# Altium PCB PCB.PcbDoc
Units mil, origin at the board's own origin, x right, y up, seen from the top; angles counter-clockwise.
Board outline 2470.47 x 1318.9 mil, 2 copper layers (Top Layer, Bottom Layer); 18 components, 21 nets, 150 pads, 31 vias.
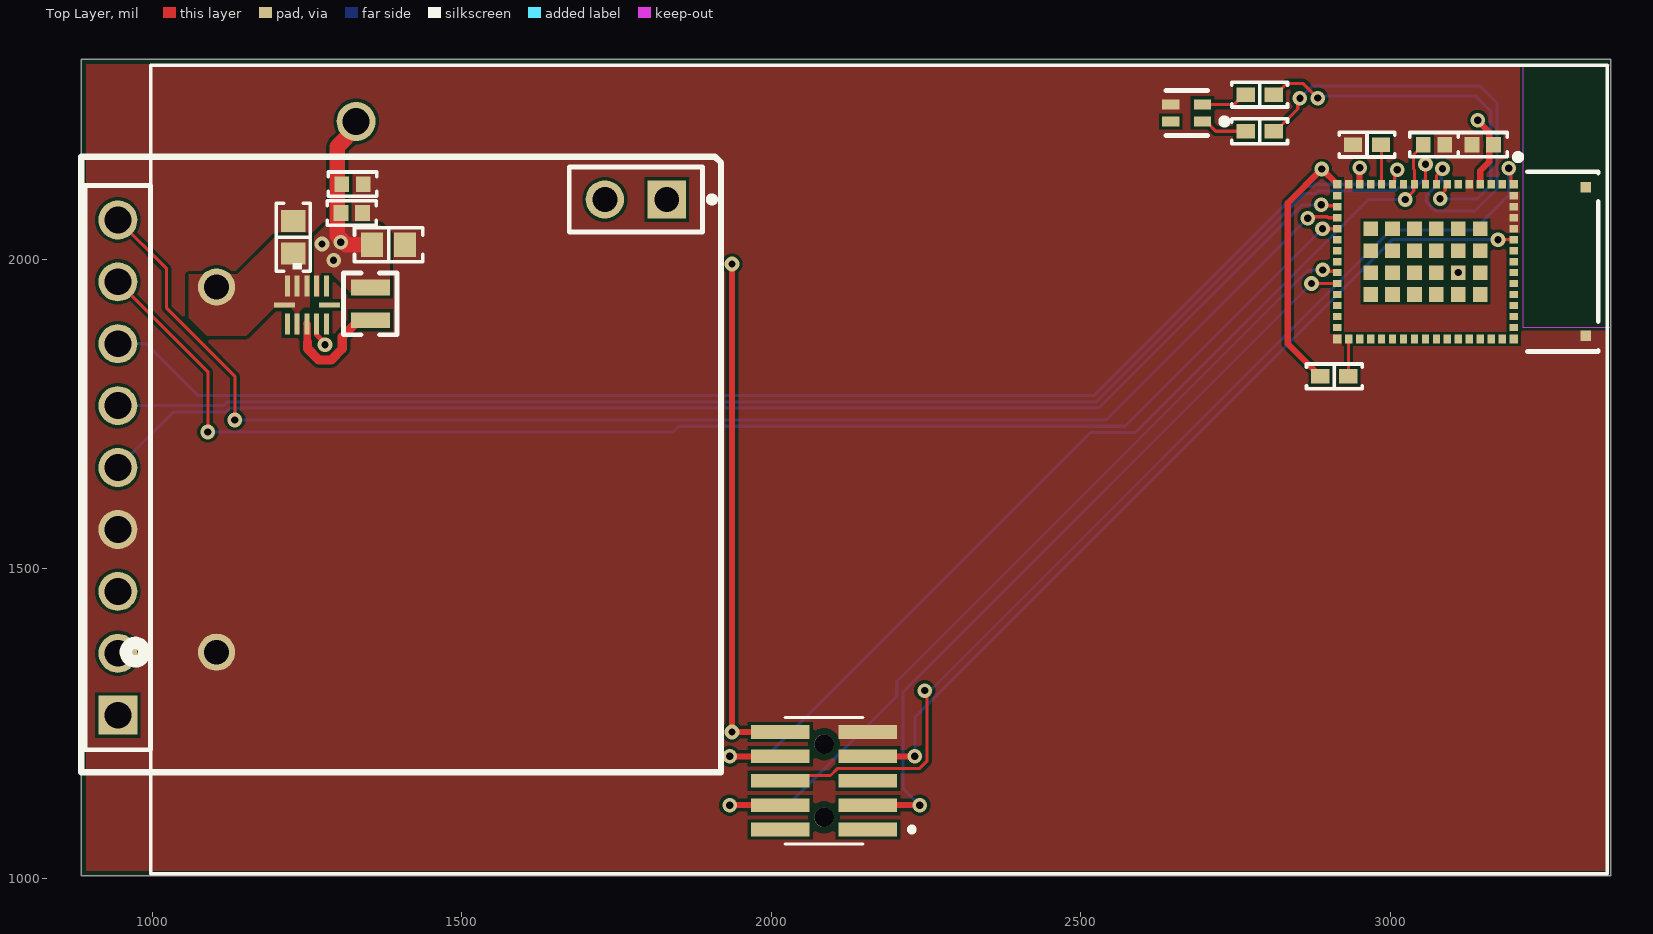
[diagram p0: Top Layer view]
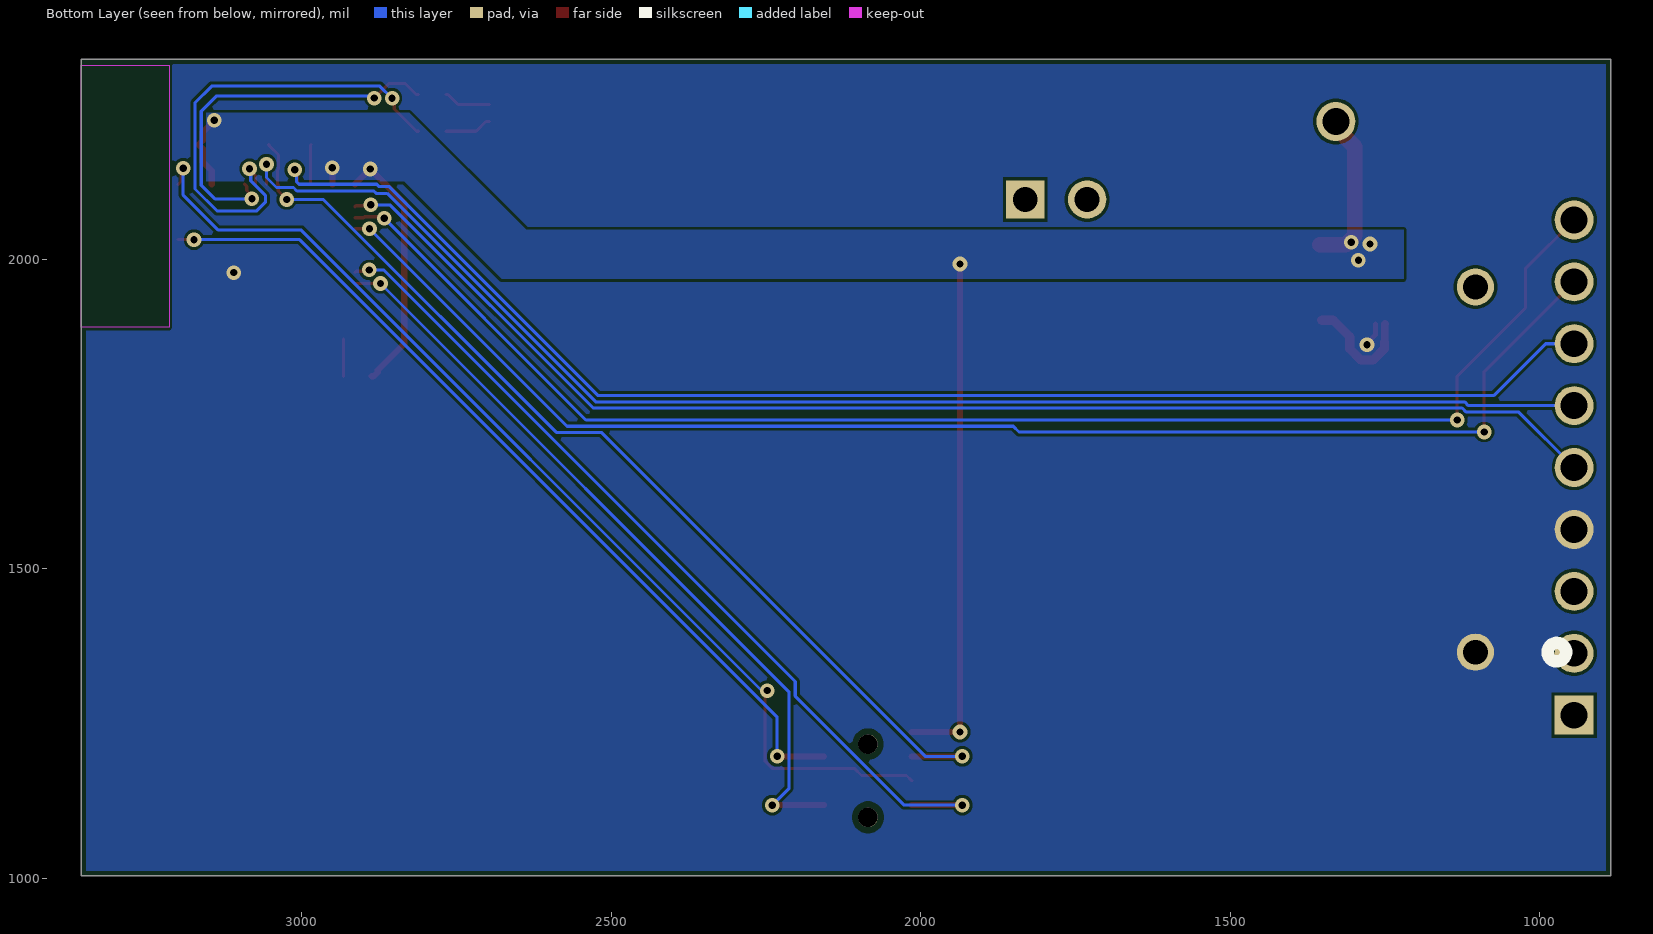
[diagram p1: Bottom Layer view, seen from below]

## Layer stack, top to bottom
Top Solder: solder mask 0.4, Solder Resist, Dk 3.5
Top Layer: signal copper 1.4
Dielectric 1: dielectric 12.6, FR-4, Dk 4.8
Bottom Layer: signal copper 1.4
Bottom Solder: solder mask 0.4, Solder Resist, Dk 3.5

## Board outline
885.83,1003.94 3356.3,1003.94 3356.3,2322.83 885.83,2322.83

## Design rules (kind name [scope] priority, off if disabled: settings)
BoardOutlineClearance [All] p1: gap=7.87 ignorepadtopadclearanceinfootprint=FALSE
Clearance [All] p1: gap=5 ignorepadtopadclearanceinfootprint=FALSE except(9.84: Arc-Hole Track-Hole SMDPad-Hole THPad-Hole Via-Hole Fill-Hole Poly-Hole Region-Hole Text-Hole)
ComponentClearance [All] p1: gap=5 collisioncheckmode=3 verticalgap=5 showdistances=TRUE
DiffPairsRouting [All] p1: maxlimit=10 minlimit=5 mostfreqgap=5 toplayer_minwidth=5 toplayer_maxwidth=1000 toplayer_prefwidth=5 bottomlayer_minwidth=5 bottomlayer_maxwidth=1000 bottomlayer_prefwidth=5 maxuncoupledlength=500
Height [All] p1: minheight=0 maxheight=71497.94 prefheight=500
HoleSize [All] p1: absolutevalues=TRUE maxlimit=248.03 minlimit=11.81 maxpercent=80.000 minpercent=20.000
HoleToHoleClearance [All] p1: gap=9.84 allowstackedmicrovias=FALSE
MinimumAnnularRing [All] p1: minimumring=3
MinimumSolderMaskSliver [All] p1: minsoldermaskwidth=0
PlaneClearance [All] p1: clearance=5
PlaneConnect PlaneConnectPowerPads [InPadClass('PowerPads')] p1: planeconnectstyle=Direct reliefexpansion=20 reliefentries=4 reliefconductorwidth=10 reliefairgap=10
PlaneConnect [All] p2: planeconnectstyle=Direct reliefexpansion=11.81 reliefentries=4 reliefconductorwidth=5 reliefairgap=5
PolygonConnect PolygonConnectPowerPads [All vs (InPadClass('PowerPads'))] p1: connectstyle=Direct reliefconductorwidth=10 reliefentries=4 polygonreliefangle="90 Angle" airgapwidth=10
PolygonConnect [All] p2: connectstyle=Direct reliefconductorwidth=5 reliefentries=4 polygonreliefangle="90 Angle" airgapwidth=5
RoutingVias [All] p1: holewidth=11.81 width=23.62 viastyle="Through Hole" minholewidth=11.81 minwidth=23.62 maxholewidth=23.62 maxwidth=259.84
SilkToSilkClearance [All] p1: silktosilkclearance=0
SilkToSolderMaskClearance [IsPad] p1: minsilkscreentomaskgap=5 clearancetoexposedcopper=TRUE
SolderMaskExpansion SolderMaskExpansion_Via [IsVia] p1: expansion=2.95 istentingtop=TRUE
SolderMaskExpansion [All] p2: expansion=2.95 istentingtop=FALSE
Width [All] p1: maxlimit=1000 minlimit=5 preferedwidth=5 minimp=50.000000 maximp=50.000000 favimp=50.000000
20 further rules are at their usual default settings.

## Classes and differential pairs
component class main: J1 J2 P1 R1

## Components (designator, comment, footprint, x,y, rotation, side; value= is the part's Value field where it differs from the comment)
B1 "" 2462_KEY 1104.33,1365.16 r180 top
C1 "" "CAP 0402_1005" 3070.87,2185.04 r0 top value="0.1 µF"
C2 "" "CAP 0603_1608" 1228.35,2035.43 r270 top value="10 µF"
C3 "" "CAP 0402_1005" 1322.72,2074.55 r180 top value="0.1 µF"
C4 "" "CAP 0402_1005" 3149.61,2185.04 r0 top value="0.1 µF"
C5 "" "CAP 0402_1005" 1323.82,2121.06 r180 top value="0.1 µF"
C6 "" "CAP 0603_1608" 1382.18,2023.35 r180 top value="10 µF"
D1 "" FP-HSMF-C165-MFG 2671.26,2236.22 r180 top
J1 "" FP-TSW-102-07-L-S-MFG 1781.5,2096.46 r180 top
J2 "" HARWIN_M40-3200545R 2085.63,1157.48 r90 top
L1 "" "TDK VLS201612CX" 1352.65,1927.87 r270 top value="2.2 µH"
MD1 "" FP-STM32WB5MMGH6TR-MFG 3118.11,1996.06 r270 top
P1 "" 61300911121 944.88,1663.39 r90 top
R1 "" "RES 0402_1005" 2909.86,1810.74 r0 top value=jmp
R2 "" "RES 0402_1005" 2962.6,2185.04 r0 top value="10 kOhms"
R3 "" "RES 0402_1005" 2789.37,2206.69 r0 top value="1.5 kOhms"
R4 "" "RES 0402_1005" 2789.37,2265.75 r0 top value="1.5 kOhms"
U1 "" TQFN12_2X1P7_STM 1250.29,1925.89 r90 top

## Footprints (in the part's own frame and the unit in brackets; to place one, negate y for a bottom-side part, rotate by r counter-clockwise, add the part's x,y. Pads: shape width x height; smd on the part's side, far side on the other; paste and mask are expansions set on the pad)
2462_KEY [mil]
  round 60 hole 40 paste-30 mask+0: 1(0,0) 2(0,-590)
  silkscreen extent -2246,-948 146,358
61300911121 [mm] "Pin Header, pitch 2.54 mm, THT, Vertical, single row, 9p"
  rect 1.6x1.6 hole 1.1: 1(-10.16,0)
  round 1.6 hole 1.1: 2(-7.62,0) 3(-5.08,0) 4(-2.54,0) 5(0,0) 6(2.54,0) 7(5.08,0) 8(7.62,0) 9(10.16,0)
  silkscreen extent -11.58,-1.35 11.58,1.35, body extent -11.43,-1.27 11.43,1.27, height 8.57
"CAP 0402_1005" [mm] "Chip Capacitor, 2-Leads, Body 1.02x0.51mm, IPC Medium Density"
  rect 0.6x0.64 smd: 1(-0.44,0) 2(0.44,0)
  silkscreen extent -1,-0.5 1,0.5, body extent -0.5,-0.26 0.5,0.26, height 0.52
"CAP 0603_1608" [mm] "Chip Capacitor, 2-Leads, Body 1.60x0.80mm, IPC Medium Density"
  rect 0.9x1 smd: 1(-0.675,0) 2(0.675,0)
  silkscreen extent -1.4,-0.7 1.4,0.7, body extent -0.8,-0.41 0.8,0.41, height 0.82
FP-HSMF-C165-MFG [mm]
  rect 0.7x0.4 smd paste+0 mask+0: 1(-0.65,0.35) 2(-0.65,-0.35) 3(0.65,0.35) 4(0.65,-0.35)
  silkscreen extent -1.68,-0.92 0.85,0.92, body extent -1.1,-0.65 1.1,0.65, height 0.25
FP-STM32WB5MMGH6TR-MFG [mm]
  rect 0.35x0.35 smd paste+0 mask+0: 1(-3.175,2.075) 17(-3.175,-5.175) 31(3.175,-5.175) 47(3.175,2.075)
  rect 0.35x0.3 smd paste+0 mask+0: 2(-3.175,1.6) 3(-3.175,1.15) 4(-3.175,0.7) 5(-3.175,0.25) 6(-3.175,-0.2) 7(-3.175,-0.65) 8(-3.175,-1.1) 9(-3.175,-1.55) 10(-3.175,-2) 11(-3.175,-2.45) 12(-3.175,-2.9) 13(-3.175,-3.35) 14(-3.175,-3.8) 15(-3.175,-4.25) 16(-3.175,-4.7) 32(3.175,-4.7) 33(3.175,-4.25) 34(3.175,-3.8) 35(3.175,-3.35) 36(3.175,-2.9) 37(3.175,-2.45) 38(3.175,-2) 39(3.175,-1.55) 40(3.175,-1.1) 41(3.175,-0.65) 42(3.175,-0.2) 43(3.175,0.25) 44(3.175,0.7) 45(3.175,1.15) 46(3.175,1.6)
  rect 0.3x0.35 smd paste+0 mask+0: 18(-2.7,-5.175) 19(-2.25,-5.175) 20(-1.8,-5.175) 21(-1.35,-5.175) 22(-0.9,-5.175) 23(-0.45,-5.175) 24(0,-5.175) 25(0.45,-5.175) 26(0.9,-5.175) 27(1.35,-5.175) 28(1.8,-5.175) 29(2.25,-5.175) 30(2.7,-5.175) 48(2.7,2.075) 49(2.25,2.075) 50(1.8,2.075) 51(1.35,2.075) 52(0.9,2.075) 53(0.45,2.075) 54(0,2.075) 55(-0.45,2.075) 56(-0.9,2.075) 57(-1.35,2.075) 58(-1.8,2.075) 59(-2.25,2.075) 60(-2.7,2.075)
  rect 0.6x0.6 smd paste+0 mask+0: 61(-1.35,0.7) 62(-1.35,-0.2) 63(-1.35,-1.1) 64(-1.35,-2) 65(-1.35,-2.9) 66(-1.35,-3.8) 67(-0.45,-3.8) 68(0.45,-3.8) 69(1.35,-3.8) 70(1.35,-2.9) 71(1.35,-2) 72(1.35,-1.1) 73(1.35,-0.2) 74(1.35,0.7) 75(0.45,0.7) 76(-0.45,0.7) 77(-0.45,-0.2) 78(-0.45,-1.1) 79(-0.45,-2) 80(-0.45,-2.9) 81(0.45,-2.9) 82(0.45,-2) 83(0.45,-1.1) 84(0.45,-0.2)
  rect 0.43x0.43 smd paste+0 mask+0: 85(-3.05,5.035) 86(3.05,5.035)
  silkscreen extent -4.41,2.13 3.69,5.54, body extent -4.19,-6.04 4.19,6.04, height 0.25
FP-TSW-102-07-L-S-MFG [mm]
  rect 1.57x1.57 hole 1.02 paste-1000 mask+0: 1(-1.27,0)
  round 1.57 hole 1.02 paste-1000 mask+0: 2(1.27,0)
  silkscreen extent -3.25,-1.34 2.73,1.34, body extent -2.83,-1.44 2.83,1.44, height 0.25
HARWIN_M40-3200545R [mm]
  rect 0.56x2.4 smd: 1(-2,-1.8) 2(-2,1.8) 3(-1,-1.8) 4(-1,1.8) 5(0,-1.8) 6(0,1.8) 7(1,-1.8) 8(1,1.8) 9(2,-1.8) 10(2,1.8)
  round 0.8 hole 0.8 unplated: ""(-1.5,0) ""(1.5,0)
  silkscreen extent -2.6,-3.7 2.6,1.6
"RES 0402_1005" [mm] "Chip Resistor, 2-Leads, Body 1.0x0.5mm, IPC Medium Density"
  rect 0.75x0.6 smd: 1(-0.575,0) 2(0.575,0)
  silkscreen extent -1.14,-0.51 1.14,0.51, body extent -0.5,-0.25 0.5,0.25, height 0.35
"TDK VLS201612CX" [mm] "Inductor, 2-Leads, Body 2.00x1.60mm, IPC Medium Density"
  rect 0.65x1.6 smd: 1(-0.675,0) 2(0.675,0)
  silkscreen extent -1.27,-1.1 1.27,1.1, body extent -1,-0.8 1,0.8, height 1.2
TQFN12_2X1P7_STM [mil]
  rect 34x8 smd paste+0 mask+0: 1(-30.5,31.5) 2(-30.5,15.75) 3(-30.5,0) 4(-30.5,-15.75) 5(-30.5,-31.5) 7(30.5,-31.5) 8(30.5,-15.75) 9(30.5,0) 10(30.5,15.75) 11(30.5,31.5)
  rect 8x34 smd paste+0 mask+0: 6(0,-36.5) 12(0,36.5)
  silkscreen extent 58,8 68,23, body extent -36,-41 36,41, height 20

## Part data
B1: library part 2462, "No Description Available", Mfr_Name="Keystone Electronics"
C1 C4 C5: library part C0402C104K7PAC7867, "CAP CER 0.1UF 4V X5R 0402", Capacitance="0.1 µF", Device Package="0402 (1005 Metric)", Manufacturer=KEMET, Operating Temperature="-55°C ~ 85°C", Supplier Part Number 1=399-14871-1-ND, Temperature Coefficient=X5R, Tolerance=±10%, Voltage - Rated=4V, Applications="Bypass, Decoupling", componentlink1description=Datasheet, componentlink1url=https://api.kemet.com/component-edge/download/datasheet/C0402C104K7PAC7867.pdf, ComponentLink2Description="DigiKey Link", ComponentLink2URL=https://www.digikey.com/en/products/detail/kemet/C0402C104K7PAC7867/7381987, lastupdated="1/9/2022 12:30:40 pm", Lifecycle Status=Active, Minimum Order=1, Mounting Type="Surface Mount, MLCC", Package / Case="0402 (1005 Metric)", packaging=TapeAndReel, Part Number=C0402C104K7PAC7867, Part Status=Active, partid=5603, price=0.01, series="SMD Comm X5R", Size / Dimension="0.039\" L x 0.020\" W (1.00mm x 0.50mm)", Supplier 1=DigiKey, Thickness (Max)="0.022\" (0.55mm)"
C2 C6: library part GRM188R60J106ME47D, "CAP CER 10UF 6.3V X5R 0603", Capacitance="10 µF", Device Package="0603 (1608 Metric)", Manufacturer="Murata Electronics", Operating Temperature="-55°C ~ 85°C", Supplier Part Number 1=490-3896-1-ND, Temperature Coefficient=X5R, Tolerance=±20%, Voltage - Rated=6.3V, Applications="General Purpose", componentlink1description=Datasheet, componentlink1url=https://www.murata.com/~/media/webrenewal/support/library/catalog/products/capacitor/mlcc/c02e.ashx?la=en-us, ComponentLink2Description="DigiKey Link", ComponentLink2URL=https://www.digikey.com/en/products/detail/murata-electronics/GRM188R60J106ME47D/965910, lastupdated="11/9/2022 9:40:24 am", Lifecycle Status=Active, Minimum Order=1, Mounting Type="Surface Mount, MLCC", Package / Case="0603 (1608 Metric)", packaging=TapeAndReel, Part Number=GRM188R60J106ME47D, Part Status=Active, partid=2351, price=0.02, series=GRM, Size / Dimension="0.063\" L x 0.031\" W (1.60mm x 0.80mm)", Supplier 1=DigiKey, Thickness (Max)="0.035\" (0.90mm)"
C3: library part C0402C104K4RECAUTO, "CAP CER 0402 0.1UF 16V X7R 10%", Capacitance="0.1 µF", Device Package="0402 (1005 Metric)", Manufacturer=KEMET, Operating Temperature="-55°C ~ 125°C", Ratings=AEC-Q200, Supplier Part Number 1=399-17167-1-ND, Temperature Coefficient=X7R, Tolerance=±10%, Voltage - Rated=16V, Applications="Automotive, ESD Protection", componentlink1description=Datasheet, componentlink1url=https://api.kemet.com/component-edge/download/datasheet/C0402C104K4RECAUTO.pdf, ComponentLink2Description="DigiKey Link", ComponentLink2URL=https://www.digikey.com/en/products/detail/kemet/C0402C104K4RECAUTO/8563695, lastupdated="1/9/2022 12:30:53 pm", Lifecycle Status=Active, Minimum Order=1, Mounting Type="Surface Mount, MLCC", Package / Case="0402 (1005 Metric)", packaging=TapeAndReel, Part Number=C0402C104K4RECAUTO, Part Status=Active, partid=1731, price=0.01, series="ESD SMD Auto X7R", Size / Dimension="0.039\" L x 0.020\" W (1.00mm x 0.50mm)", Supplier 1=DigiKey, Thickness (Max)="0.022\" (0.55mm)"
D1: library part CMP-2000-06424-2, "LED GREEN/RED DIFFUSED 0603 SMD", Case Code (Imperial)=0603, Case Code (Metric)=1608, Color=Green, Forward Current=20mA, Forward Voltage=2.2V, Lens Color=White, Max Operating Temperature=85°C, Min Operating Temperature=-40°C, Package Quantity=1, Power Dissipation=52mW, Reverse Voltage=5V, Case/Package=0603, Depth=0.8mm, Dominant Wavelength=621nm, Height=0.5mm, Illumination Color=Green, Lead Free="Lead Free", Length=1.6mm, Lens Style=Rectangular, Lens Transparency=Diffused, Luminous Intensity=10mcd, Mount="Surface Mount", Number of Elements=2, Number of LEDs=2, Number of Pins=4, Number of Terminals=4, packaging="Tape and Reel", Power Rating=52mW, Radiation Hardening=No, REACH SVHC="No SVHC", Shape=Rectangular, Test Current=20mA, Viewing Angle=120°, Wavelength=572nm, Width=0.8mm
J1: library part CMP-02766-001428-1, "CONN HEADER VERT 2POS 2.54MM", Color=Black, Current Rating=7.6A, Max Operating Temperature=125°C, Max Voltage Rating (AC)=550V, Min Operating Temperature=-55°C, Package Quantity=1, Connector Type="Male Pin", Contact Material=Bronze, Contact Mating Length=0.23inch, Contact Plating=Gold, Contact Type="Male Pin", Depth=2.54mm, Gender=Male, Housing Color=Black, Housing Material=Polyester, Lead Free="Lead Free", Length=5.08mm, Max Current Rating=7.6A, Mount="Through Hole", Number of Contacts=2, Number of Positions=2, Number of Rows=1, Orientation=Straight, packaging=Bulk, Pitch=2.54mm, Radiation Hardening=No, REACH SVHC="No SVHC", RoHS Compliant=Yes, series=TSW, Termination=Solder, Voltage Rating=550V, Width=2.54mm
J2: library part M40-3200545R, "Connector Header Surface Mount 10 position 0.039 _1.00mm_", Package=None, Availability=Unavailable, MF="Harwin Inc.", MP=M40-3200545R, price=None, SnapEDA_Link=https://www.snapeda.com/parts/M40-3200545R/Harwin%20Inc./view-part/494409/?ref=snap
L1: library part VLS201612CX-6R8M-1, "FIXED IND 6.8UH 930MA 368MOHM SM", Current - Saturation=730mA, Current Rating (Amps)="930 mA", DC Resistance (DCR)="368mOhm Max", Device Package=Nonstandard, Inductance="6.8 µH", Inductance Frequency - Test="1 MHz", Manufacturer="TDK Corporation", Operating Temperature="-40°C ~ 105°C", Supplier Device Package=2016, Supplier Part Number 1=445-172966-1-ND, Tolerance=±20%, componentlink1description=Datasheet, componentlink1url=https://product.tdk.com/info/en/catalog/datasheets/inductor_commercial_power_vls201612cx-1_en.pdf?ref_disty=digikey, ComponentLink2Description="DigiKey Link", ComponentLink2URL=https://www.digikey.com/en/products/detail/tdk-corporation/VLS201612CX-6R8M-1/5169771, Height - Seated (Max)="0.047\" (1.20mm)", lastupdated="11/9/2022 10:31:03 am", Lifecycle Status=Active, Material - Core=Ferrite, Minimum Order=1, Mounting Type="Surface Mount", Package / Case=Nonstandard, packaging=TapeAndReel, Part Number=VLS201612CX-6R8M-1, Part Status=Active, partid=207, price=0.13, series=VLS-CX-1, Shielding=Shielded, Size / Dimension="0.079\" L x 0.063\" W (2.00mm x 1.60mm)", Supplier 1=DigiKey, Type="Drum Core, Wirewound"
MD1: library part CMP-12160-000017-1, "ULTRA-LOW-POWER DUAL CORE ARM CO"
P1: library part CMP-1502-01080-1, "THT Vertical Pin Header WR-PHD, Pitch 2.54 mm, Single Row, 9 pins", Contact Resistance=20mOhm, Manufacturer="Wurth Elektronik", Operating Temperature=-40to105degC, Package Reference=61300911121, Rated Current=3A, Withstanding Voltage=500VAC, Working Voltage=250VAC, Datasheet URL=https://katalog.we-online.de/em/datasheet/6130xx11121.pdf, Gender=Male, Manufacturer URL=http://www.we-online.de, Mounting Technology=THT, Orientation=Vertical, packaging=Bag, Part Number=61300911121, Pin Number=9, Pitch=2.54mm, Publisher=WurthElektronik, Row Number=Single
R1 R2: library part RP73PF1E10KBTD, "RES 10K OHM 0.1% 1/10W 0402", Device Package="0402 (1005 Metric)", Manufacturer="TE Connectivity Passive Product", Operating Temperature="-55°C ~ 155°C", Power (Watts)="0.1W, 1/10W", Resistance="10 kOhms", Supplier Device Package=0402, Supplier Part Number 1=A127415CT-ND, Temperature Coefficient=±25ppm/°C, Tolerance=±0.1%, componentlink1description=Datasheet, componentlink1url=https://www.te.com/commerce/DocumentDelivery/DDEController?Action=srchrtrv&DocNm=1773272&DocType=DS&DocLang=English, ComponentLink2Description="DigiKey Link", ComponentLink2URL=https://www.digikey.com/en/products/detail/te-connectivity-passive-product/RP73PF1E10KBTD/8260957, Composition="Thin Film", Height - Seated (Max)="0.014\" (0.35mm)", lastupdated="1/9/2022 12:46:57 pm", Lifecycle Status=Active, Minimum Order=1, Number of Terminations=2, Package / Case="0402 (1005 Metric)", packaging=TapeAndReel, Part Number=RP73PF1E10KBTD, Part Status=Active, partid=2434, price=0.09, series="RP73, Holsworthy", Size / Dimension="0.039\" L x 0.020\" W (1.00mm x 0.50mm)", Supplier 1=DigiKey
R3 R4: library part ERA-2VRW1501X, "RES 1.5K OHM 0.05% 1/10W 0402", Device Package="0402 (1005 Metric)", Manufacturer="Panasonic Electronic Components", Operating Temperature="-55°C ~ 155°C", Power (Watts)="0.1W, 1/10W", Ratings=AEC-Q200, Resistance="1.5 kOhms", Supplier Device Package=0402, Supplier Part Number 1=10-ERA-2VRW1501XCT-ND, Temperature Coefficient=±10ppm/°C, Tolerance=±0.05%, componentlink1description=Datasheet, componentlink1url=https://api.pim.na.industrial.panasonic.com/file_stream/main/fileversion/9152, ComponentLink2Description="DigiKey Link", ComponentLink2URL=https://www.digikey.com/en/products/detail/panasonic-electronic-components/ERA-2VRW1501X/12086957, Composition="Thin Film", Features="Anti-Sulfur, Automotive AEC-Q200", Height - Seated (Max)="0.016\" (0.40mm)", lastupdated="11/9/2022 9:53:08 am", Lifecycle Status=Active, Minimum Order=1, Number of Terminations=2, Package / Case="0402 (1005 Metric)", packaging=TapeAndReel, Part Number=ERA-2VRW1501X, Part Status=Active, partid=67400, price=0.24, series=ERA-2V, Size / Dimension="0.039\" L x 0.020\" W (1.00mm x 0.50mm)", Supplier 1=DigiKey
U1: library part ST1PS03A1QTR, "No Description Available", Mfr_Name=STMicroelectronics, RefDes=RefDes, Type=Type

## Free pads (board coordinates)
  round 62.99 hole 43.31: 5(1329.77,2222.44)

## Via types
v1: diameter 23.62, hole 11.81, Top Layer to Bottom Layer, tented both sides, 31 vias

## Nets (pads, with @x,y where several pads share a name; then routed paths per layer and width w, separated by ;. In a path a pad name is that pad's centre, name@x,y a point inside that pad or via, vN(x,y) a via of type N, cw(c..) or ccw(c..) an arc to the next point about the centre after c; other vN are vias at no path point)
1V8: MD1.6
2V5: C3.2 C4.2 C5.2 C6.2 J2.10 L1.1 MD1.4 MD1.15 MD1.17 pad.5 R1.1 U1.8 | length 1658.5
  Top Layer w10: v1(1937.01,1992.13) v1(1937.01,1236.22) J2.10 ; R1.1 2884.27,1810.74 2877.46,1817.55 2877.46,1820.5 2834.65,1863.31 2834.65,2090.55 v1(2889.76,2145.67) MD1.17 ; MD1.15 v1(2950.79,2147.64) ; v1(3141.73,2224.41) 3141.73,2223.26 3160.12,2204.88 3160.12,2191.85 C4.2 3160.14,2178.25 3160.14,2157.44 3145.67,2142.97 MD1.4
  Top Layer w25: pad.5 1329.77,2212.16 1299.21,2181.61 1299.21,2037.99 1313.86,2023.35 C6.2
  other v1: 1293.31,1998.03 1274.61,2024.61 1305.12,2027.56
GND: B1.1 C1.2 C2.1 C3.1 C4.1 C5.1 C6.1 D1.4 J2.9 MD1.5 MD1.16 MD1.31 MD1.57 MD1.58 MD1.59 MD1.60 MD1.84 MD1.86 P1.4 R2.1 U1.4 | length 41.6
  Top Layer w5: v1@1277.95,1860 v1(1279.53,1861.58)
  Top Layer w8: U1.4 1266.04,1877.41 1279.53,1863.92 v1(1279.53,1861.58)
  other v1: 3110.24,1978.35
GPIO1: MD1.19 P1.5 | length 2147.4
  Top Layer w5: v1@2888.03,2087.83 v1(2888.78,2087.83) 2890.37,2086.24 2912.78,2086.24 MD1.19
  Bottom Layer w5: P1.5 1034.88,1753.39 1119.78,1753.39 1125.86,1759.47 2529.52,1759.47 2857.88,2087.83 v1(2888.78,2087.83)
GPIO4: MD1.21 P1.8 | length 2262.9
  Top Layer w5: P1.8 1090.18,1818.09 v1(1090.18,1720.85) ; v1(2890.75,2049.21) MD1.21
  Bottom Layer w5: v1(1090.18,1720.85) 1841.6,1720.85 1850.91,1730.16 2571.69,1730.16 v1(2890.75,2049.21)
GPIO5: MD1.20 P1.9 | length 2318.7
  Top Layer w5: P1.9 1023.62,1984.65 1023.62,1920.89 1133.86,1810.65 v1(1133.86,1740.16) ; v1(2867.05,2066.01) 2869.56,2068.52 2898.75,2068.52 2900.34,2066.93 MD1.20
  Bottom Layer w5: v1(1133.86,1740.16) 2541.2,1740.16 v1(2867.05,2066.01)
IPC_RX: MD1.9 P1.6 | length 2319
  Top Layer w5: MD1.9 v1(3057.09,2153.54)
  Bottom Layer w5: P1.6 1115.63,1763.39 1121.72,1769.47 2525.37,1769.47 2862.2,2106.3 2879.93,2106.3 2883.87,2110.24 3008.08,2110.24 3013.61,2115.77 3040.96,2115.77 3057.09,2131.89 v1(3057.09,2153.54)
IPC_TX: MD1.12 P1.7 | length 2293
  Top Layer w5: MD1.12 3007.34,2124.47 3007.34,2134.89 3011.67,2139.22 v1(3011.67,2144.26) v1@3014.76,2147.35
  Bottom Layer w5: P1.7 990.94,1863.39 1074.86,1779.47 2521.23,1779.47 2858.84,2117.08 2875.05,2117.08 2878.98,2121.01 3004.72,2121.01 3008.65,2124.95 3008.65,2141.24 v1(3011.67,2144.26)
LED1: MD1.8 R3.2 | length 780.8
  Top Layer w5: R3.2 2814.96,2206.69 2850.77,2242.5 2850.77,2256.28 v1(2854.33,2259.84) ; MD1.8 3074.8,2134.35 3084.66,2144.21 v1(3084.66,2145.88) v1@3081.69,2148.85
  Bottom Layer w5: v1(2854.33,2259.84) 2874.02,2279.53 3145.67,2279.53 3172.54,2252.66 3172.54,2113.48 3137.11,2078.05 3072.71,2078.05 3059.06,2091.71 3059.06,2103.02 3082.61,2126.57 3082.61,2143.83 v1(3084.66,2145.88)
LED2: MD1.7 R4.2 | length 618.5
  Top Layer w5: R4.2 2814.96,2265.75 2832.68,2283.46 2859.7,2283.46 v1(2882.95,2260.22) ; v1(3080.71,2097.36) 3080.71,2102.4 3089.11,2110.81 3089.11,2117.66 MD1.7
  Bottom Layer w5: v1(2882.95,2260.22) 2886.51,2263.78 3137.8,2263.78 3162.54,2239.04 3162.54,2119.23 3140.67,2097.36 v1(3080.71,2097.36)
NetB1_2: B1.2 C2.2 U1.2 U1.9 U1.10 U1.11 U1.12
NetD1_1: D1.1 R3.1 | length 76.4
  Top Layer w5: D1.1 2702.76,2222.44 2718.5,2206.69 R3.1
NetD1_2: D1.2 R4.1 | length 76.4
  Top Layer w5: D1.2 2748.03,2250 2763.78,2265.75 R4.1
NetL1_2: L1.2 U1.3 | length 187.3
  Top Layer w12: U1.3 1251.04,1894.65 1251.04,1865.89
  Top Layer w15: 1251.04,1865.89 1251.04,1855.7 1269.46,1837.27 1289.6,1837.27 1307.44,1855.11 1307.44,1874.79 1333.95,1901.3 L1.2
NetMD1_13: MD1.13 R2.2 | length 64.4
  Top Layer w5: R2.2 2986.22,2184.06 MD1.13
NetMD1_32: MD1.32 R1.2 | length 60.6
  Top Layer w5: R1.2 2933.07,1811.31 MD1.32
nRST: C1.1 J2.8 MD1.10 | length 1647.7
  Top Layer w5: v1(3024.61,2096.46) 3038.26,2110.11 3038.26,2119.95 MD1.10 3039.37,2143.95 3037.78,2145.54 3037.78,2168.48 3053.54,2184.25 C1.1
  Top Layer w10: v1(1933.07,1196.85) J2.8
  Bottom Layer w5: v1(1933.07,1196.85) 1993.17,1196.85 2516.48,1720.16 2589,1720.16 2965.3,2096.46 v1(3024.61,2096.46)
RX: J2.7 MD1.56 | length 1426.1
  Top Layer w5: v1(3174.21,2031.5) MD1.56
  Top Layer w10: J2.7 v1(2232.28,1196.85)
  Bottom Layer w5: v1(2232.28,1196.85) 2232.28,1260.09 3003.69,2031.5 v1(3174.21,2031.5)
SWDCLK: J2.3 MD1.26 | length 1252.2
  Top Layer w5: v1(2873.03,1960.63) MD1.26
  Top Layer w10: J2.3 v1(2240.16,1118.11)
  Bottom Layer w5: v1(2240.16,1118.11) 2212.97,1145.3 2212.97,1300.57 v1(2873.03,1960.63)
SWDIO: J2.4 MD1.25 | length 1436.8
  Top Layer w5: v1(2891.35,1982.62) 2893.49,1980.48 2912.23,1980.48 MD1.25
  Top Layer w10: v1(1933.07,1118.11) J2.4
  Bottom Layer w5: v1(1933.07,1118.11) 2026.93,1118.11 2202.97,1294.15 2202.97,1317.88 2867.71,1982.62 v1(2891.35,1982.62)
TX: J2.6 MD1.1 | length 1718.8
  Top Layer w5: J2.6 2023.29,1166 2096.15,1166 2107.57,1177.43 2240.17,1177.43 2251.59,1188.85 2251.59,1299.59 v1(2248.03,1303.15) ; v1@3191.85,2152.48 v1(3191.85,2146.65) 3195.41,2143.09 3195.41,2125.45 MD1.1
  Bottom Layer w5: v1(2248.03,1303.15) 2257.51,1303.15 3001.74,2047.37 3135.8,2047.37 3191.85,2103.43 v1(3191.85,2146.65)
pads on no net: D1.3 J1.1 J1.2 J2. J2.1 J2.2 J2.5 MD1.2 MD1.3 MD1.11 MD1.14 MD1.18 MD1.22 MD1.23 MD1.24 MD1.27 MD1.28 MD1.29 MD1.30 MD1.33 MD1.34 MD1.35 MD1.36 MD1.37 MD1.38 MD1.39 MD1.40 MD1.41 MD1.42 MD1.43 MD1.44 MD1.45 MD1.46 MD1.47 MD1.48 MD1.49 MD1.50 MD1.51 MD1.52 MD1.53 MD1.54 MD1.55 MD1.61 MD1.62 MD1.63 MD1.64 MD1.65 MD1.66 MD1.67 MD1.68 MD1.69 MD1.70 MD1.71 MD1.72 MD1.73 MD1.74 MD1.75 MD1.76 MD1.77 MD1.78 MD1.79 MD1.80 MD1.81 MD1.82 MD1.83 MD1.85 P1.1 P1.2 P1.3 U1.1 U1.5 U1.6 U1.7

## Polygon pours and split planes (outlines as drawn)
GND on Top Layer "NONET_L01_P-001" (solid, pour order 4): 866.14,2362.2 3385.83,2362.2 3385.83,984.25 866.14,984.25
NetB1_2 on Top Layer "NONET_L01_P-001" (solid, pour order 2): 1059.06,1975.39 1137.8,1975.39 1199.8,2037.4 1251.97,2037.4 1251.97,1979.33 1254.92,1976.38 1254.92,1922.24 1245.08,1922.24 1238.19,1915.35 1238.19,1878.94 1230.32,1878.94 1230.32,1915.35 1223.43,1922.24 1222.44,1921.26 1197.83,1921.26 1152.56,1875.98 1088.58,1875.98 1059.06,1905.51
2V5 on Top Layer "NONET_L01_P-001" (solid, pour order 0): 1270.67,1939.96 1270.67,1973.43 1274.61,1977.36 1289.37,1977.36 1324.8,1941.93 1383.86,1941.93 1383.86,2040.35 1368.11,2056.1 1367.13,2055.12 1279.53,2055.12 1261.81,2037.4 1261.81,1939.96
GND on Bottom Layer "NONET_L01_P-001" (solid, pour order 5): 866.14,2362.2 3385.83,2362.2 3385.83,984.25 866.14,984.25
2V5 on Bottom Layer "NONET_L01_P-001" (solid, pour order 3): 1220.47,1968.5 2677.17,1968.5 2834.65,2125.98 3157.48,2125.98 3157.48,2236.22 2826.77,2236.22 2637.8,2047.24 1220.47,2047.24

## Keep-outs
Top Layer:
  rectangle: 3214.57,1889.76 3356.3,2312.99
Bottom Layer:
  rectangle: 3214.57,1889.76 3356.3,2312.99

## Silkscreen, mask and mechanical layers (free items; w line width, h text height)
Top Overlay:
  lines w10: 885.83,1171.26 885.83,2165.35 1909.45,2165.35 1919.29,2155.51 1919.29,1171.26 885.83,1171.26